# Altium PCB PCB.PcbDoc (part 2 of 3)
Units mm, origin at the board's own origin, x right, y up, seen from the top; angles counter-clockwise.
Board outline 70 x 30 mm, 4 copper layers (Top Layer, Layer 2, Layer 3, Bottom Layer), stack 1.571 mm thick; 89 components, 59 nets, 279 pads, 164 vias.
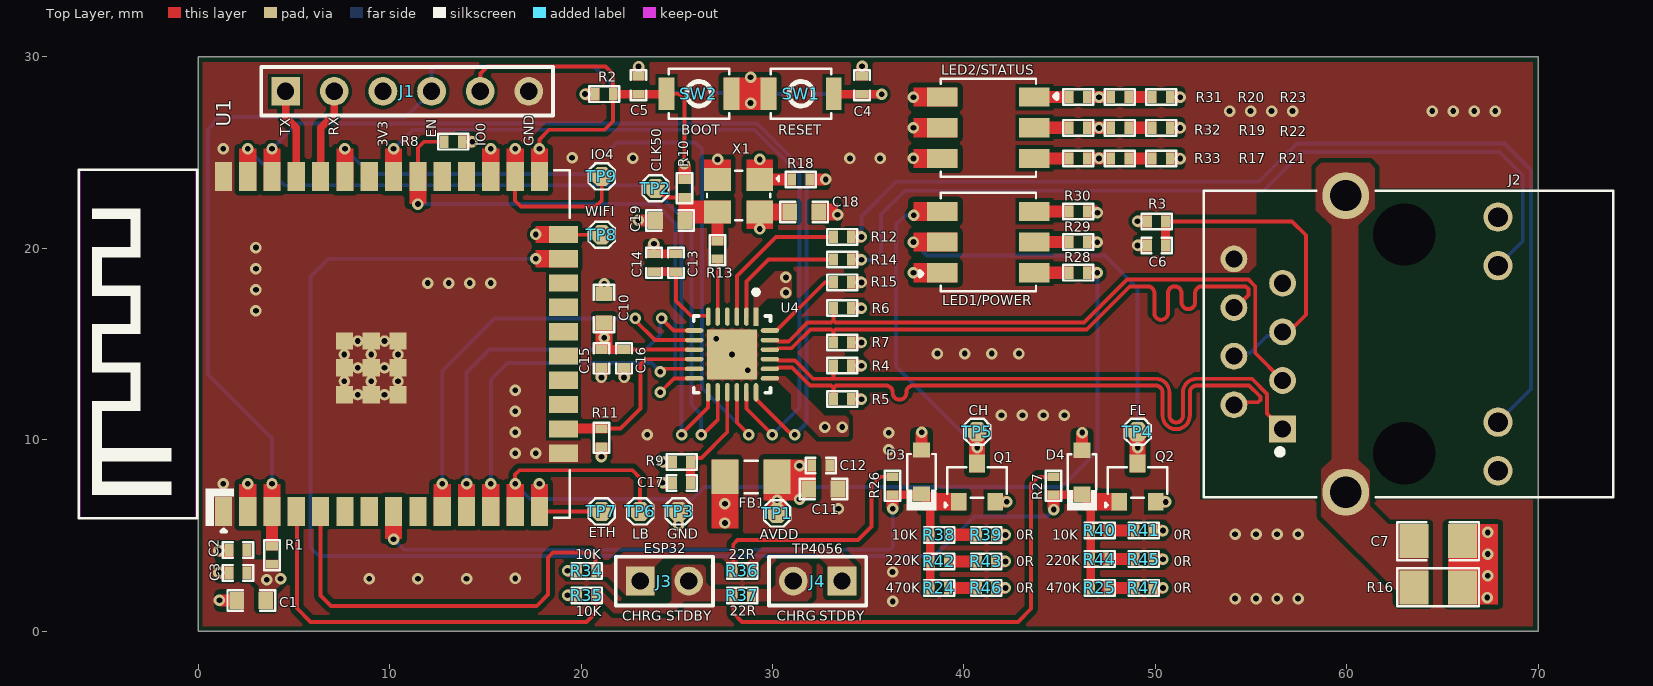
[diagram p0: Top Layer view]

## Part data (continued)
R24 R25: library part RC0402FR-07470KL, "RES 470K OHM 1% 1/16W 0402", Case Code (Imperial)=0402, Case Code (Metric)=1005, LCSC Part Number=C137976, Manufacturer=Yageo, Max Operating Temperature=155°C, Max Power Dissipation=63mW, Min Operating Temperature=-55°C, Package Quantity=1, Power Rating=62.5mW, Resistance Tolerance=1%, Resistor Type="Thick Film", Supplier Part Number=7702467, Temperature Coefficient=100ppm/°C, Voltage Rating=50V, Case/Package=0402, Category="Chip SMD Resistors", ComponentLink1Description=https://datasheet.ciiva.com/11819/0900766b80c66297-11819514.pdf?src-supplier=Rs, ComponentLink1URL=https://datasheet.ciiva.com/11819/0900766b80c66297-11819514.pdf?src-supplier=Rs, ComponentLink2Description=https://datasheet.ciiva.com/46412/1018594-46412837.pdf?src-supplier=Element14, ComponentLink2URL=https://datasheet.ciiva.com/46412/1018594-46412837.pdf?src-supplier=Element14, ComponentLink3Description=https://datasheet.ciiva.com/2453/pyu-r-int-thick-7-2453434.pdf?src-supplier=Digi-Key, ComponentLink3URL=https://datasheet.ciiva.com/2453/pyu-r-int-thick-7-2453434.pdf?src-supplier=Digi-Key, ComponentLink4Description=https://datasheet.ciiva.com/2453/pyu-r-int-thick-7-2453435.pdf?src-supplier=Digi-Key, ComponentLink4URL=https://datasheet.ciiva.com/2453/pyu-r-int-thick-7-2453435.pdf?src-supplier=Digi-Key, ComponentLink5Description=https://datasheet.ciiva.com/2453/pyu-r-int-thick-7-2453433.pdf?src-supplier=Digi-Key, ComponentLink5URL=https://datasheet.ciiva.com/2453/pyu-r-int-thick-7-2453433.pdf?src-supplier=Digi-Key, ComponentLink6Description=https://datasheet.ciiva.com/7850/1018594-7850012.pdf?src-supplier=Element14, ComponentLink6URL=https://datasheet.ciiva.com/7850/1018594-7850012.pdf?src-supplier=Element14, ComponentLink7Description=https://datasheet.ciiva.com/7850/1018594-7850013.pdf?src-supplier=Element14, ComponentLink7URL=https://datasheet.ciiva.com/7850/1018594-7850013.pdf?src-supplier=Element14, ComponentLink8Description=https://datasheet.ciiva.com/15189/getdatasheetpartid-325138-15189462.pdf?src-supplier=Verical, ComponentLink8URL=https://datasheet.ciiva.com/15189/getdatasheetpartid-325138-15189462.pdf?src-supplier=Verical, Construction=Rectangular, Depth=0.5mm, Features="Moisture Resistant", Height=0.016inch, Item Type=Resistor, Lead Free=5697LeadFree, Length=0.039inch, Manufacturer Part Number=RC0402FR-07470KL, Military Standard=Not, Number of Terminations=2, Packaging="Tape and Reel", Pins=2, Pricing="10000=0.0009, 50000=0.0008, 300000=0.0008, 1000000=0.0007, 3000000=0.0007 (USD)", Reach SVHC Compliant=No, RoHS=Yes, RoHS Compliant=Yes, Series=RC, Stock=330000, Supplier="Future Electronics", Technology="THICK FILM", Termination=SMD/SMT, Tolerance=1%, Voltage Rating (AC)=50V, Voltage Rating (DC)=50V, Width=0.02inch
R28 R29 R30 R31 R32 R33: library part RC0402FR-07100RL, "RES 100 OHM 1% 1/16W 0402", Case Code (Imperial)=0402, Case Code (Metric)=1005, LCSC Part Number=C106232, Manufacturer=Yageo, Max Operating Temperature=155°C, Max Power Dissipation=63mW, Min Operating Temperature=-55°C, Power Rating=62.5mW, Resistance Tolerance=1%, Resistor Type="Thick Film", Supplier Part Number 1=603-RC0402FR-07100RL, Temperature Coefficient=100ppm/°C, Voltage Rating=50V, Case/Package=0402, Category="Chip SMD Resistors", ComponentLink1Description=https://datasheet.ciiva.com/11808/0900766b80c66297-11808765.pdf?src-supplier=RSComponents, ComponentLink1URL=https://datasheet.ciiva.com/11808/0900766b80c66297-11808765.pdf?src-supplier=RSComponents, ComponentLink2Description=https://datasheet.ciiva.com/7849/1784430-7849810.pdf?src-supplier=Element14, ComponentLink2URL=https://datasheet.ciiva.com/7849/1784430-7849810.pdf?src-supplier=Element14, ComponentLink3Description=https://datasheet.ciiva.com/28367/1018594-28367226.pdf?src-supplier=Element14, ComponentLink3URL=https://datasheet.ciiva.com/28367/1018594-28367226.pdf?src-supplier=Element14, ComponentLink4Description=https://datasheet.ciiva.com/22747/1018594-22747511.pdf?src-supplier=Element14, ComponentLink4URL=https://datasheet.ciiva.com/22747/1018594-22747511.pdf?src-supplier=Element14, ComponentLink5Description=https://datasheet.ciiva.com/12667/pyu-rc0402-51-rohs-l-6-r-12667957.pdf?src-supplier=Mouser, ComponentLink5URL=https://datasheet.ciiva.com/12667/pyu-rc0402-51-rohs-l-6-r-12667957.pdf?src-supplier=Mouser, ComponentLink6Description=https://datasheet.ciiva.com/15189/getdatasheetpartid-329466-15189335.pdf?src-supplier=Verical, ComponentLink6URL=https://datasheet.ciiva.com/15189/getdatasheetpartid-329466-15189335.pdf?src-supplier=Verical, ComponentLink7Description=https://datasheet.ciiva.com/16740/pyu-rc0402-51-rohs-l-6-r-16740566.pdf?src-supplier=Future+Electronics, ComponentLink7URL=https://datasheet.ciiva.com/16740/pyu-rc0402-51-rohs-l-6-r-16740566.pdf?src-supplier=Future+Electronics, Construction=Rectangular, Depth=0.5mm, Features="Moisture Resistant", Height=0.32mm, Item Type=Resistor, Lead Free="Lead Free", Length=1mm, Manufacturer Part Number=RC0402FR-07100RL, Military Standard=Not, Number of Pins=2, Number of Terminations=2, Packaging="Tape and Reel", Pricing 1="1=0.10000, 10=0.01200, 50=0.01200, 100=0.00500, 1000=0.00300, 2500=0.00200, 10000=0.00100 (USD)", REACH SVHC="No SVHC", Resistance=100R, RoHS=Yes, RoHS Compliant=Yes, Series=RC, Size Code=0402, Stock 1=699545, Supplier 1=Mouser, Technology="THICK FILM", Termination=SMD/SMT, Tolerance=1%, Voltage Rating (DC)=50V, Width=0.5mm
R34 R35: library part RC0402FR-07100KL, "RES 100K OHM 1% 1/16W 0402", Case Code (Imperial)=0402, Case Code (Metric)=1005, LCSC Part Number=C60491, Manufacturer=Yageo, Max Operating Temperature=155°C, Max Power Dissipation=63mW, Min Operating Temperature=-55°C, Package Quantity=1, Resistance=100kR, Resistance Tolerance=1%, Resistor Type="Thick Film", Supplier Part Number 1=603-RC0402FR-07100KL, Temperature Coefficient=100ppm/°C, Voltage Rating=50V, Case/Package=0402, Category="Chip SMD Resistors", ComponentLink1Description=https://datasheet.ciiva.com/11819/0900766b80c66297-11819452.pdf?src-supplier=RSComponents, ComponentLink1URL=https://datasheet.ciiva.com/11819/0900766b80c66297-11819452.pdf?src-supplier=RSComponents, ComponentLink2Description=https://datasheet.ciiva.com/22747/1018594-22747509.pdf?src-supplier=Element14, ComponentLink2URL=https://datasheet.ciiva.com/22747/1018594-22747509.pdf?src-supplier=Element14, ComponentLink3Description=https://datasheet.ciiva.com/2453/pyu-r-int-thick-7-2453362.pdf?src-supplier=Digi-Key, ComponentLink3URL=https://datasheet.ciiva.com/2453/pyu-r-int-thick-7-2453362.pdf?src-supplier=Digi-Key, ComponentLink4Description=https://datasheet.ciiva.com/2453/pyu-r-int-thick-7-2453363.pdf?src-supplier=Digi-Key, ComponentLink4URL=https://datasheet.ciiva.com/2453/pyu-r-int-thick-7-2453363.pdf?src-supplier=Digi-Key, ComponentLink5Description=https://datasheet.ciiva.com/2453/pyu-r-int-thick-7-2453361.pdf?src-supplier=Digi-Key, ComponentLink5URL=https://datasheet.ciiva.com/2453/pyu-r-int-thick-7-2453361.pdf?src-supplier=Digi-Key, ComponentLink6Description=https://datasheet.ciiva.com/12667/pyu-rc0402-51-rohs-l-6-r-12667930.pdf?src-supplier=Mouser, ComponentLink6URL=https://datasheet.ciiva.com/12667/pyu-rc0402-51-rohs-l-6-r-12667930.pdf?src-supplier=Mouser, ComponentLink7Description=https://datasheet.ciiva.com/15189/getdatasheetpartid-323696-15189334.pdf?src-supplier=Verical, ComponentLink7URL=https://datasheet.ciiva.com/15189/getdatasheetpartid-323696-15189334.pdf?src-supplier=Verical, Construction=Rectangular, Depth=0.5mm, Features="Moisture Resistant", Height=0.016inch, Item Type=Resistor, Lead Free="Lead Free", Length=0.039inch, Manufacturer Part Number=RC0402FR-07100KL, Military Standard=Not, Number of Terminations=2, Packaging="Tape and Reel", Power Rating=63mW, Pricing 1="1=0.10000, 10=0.01200, 50=0.01200, 100=0.00500, 1000=0.00300, 2500=0.00200, 10000=0.00100 (USD)", REACH SVHC="No SVHC", RoHS=Yes, RoHS Compliant=Yes, Series=RC, Stock 1=7759549, Supplier 1=Mouser, Technology="THICK FILM", Termination=SMD/SMT, Tolerance=1%, Width=0.02inch, Working Voltage=50V
R36 R37: library part RC0402FR-0722RL, "RES 22 OHM 1% 1/16W 0402", Case Code (Imperial)=0402, Case Code (Metric)=1005, LCSC Part Number=C114765, Manufacturer=Yageo, Max Operating Temperature=155°C, Max Power Dissipation=63mW, Min Operating Temperature=-55°C, Power Rating=62.5mW, Resistance Tolerance=1%, Resistor Type="Thick Film", Temperature Coefficient=100ppm/°C, Voltage Rating=50V, Case/Package=0402, Category="Chip SMD Resistors", ComponentLink1Description=https://datasheet.ciiva.com/11819/0900766b80c66297-11819462.pdf?src-supplier=RSComponents, ComponentLink1URL=https://datasheet.ciiva.com/11819/0900766b80c66297-11819462.pdf?src-supplier=RSComponents, ComponentLink2Description=https://datasheet.ciiva.com/7849/1018594-7849912.pdf?src-supplier=Element14, ComponentLink2URL=https://datasheet.ciiva.com/7849/1018594-7849912.pdf?src-supplier=Element14, ComponentLink3Description=https://datasheet.ciiva.com/7849/1018594-7849911.pdf?src-supplier=Element14, ComponentLink3URL=https://datasheet.ciiva.com/7849/1018594-7849911.pdf?src-supplier=Element14, ComponentLink4Description=https://datasheet.ciiva.com/16930/pyu-rc0402-51-rohs-l-6-r-16930687.pdf?src-supplier=Future+Electronics, ComponentLink4URL=https://datasheet.ciiva.com/16930/pyu-rc0402-51-rohs-l-6-r-16930687.pdf?src-supplier=Future+Electronics, ComponentLink5Description=https://datasheet.ciiva.com/26829/getdatasheetpartid-554995-26829991.pdf?src-supplier=Verical, ComponentLink5URL=https://datasheet.ciiva.com/26829/getdatasheetpartid-554995-26829991.pdf?src-supplier=Verical, Construction=Rectangular, Depth=0.5mm, Features="Moisture Resistant", Height=0.32mm, Item Type=Resistor, Lead Free="Lead Free", Length=1mm, Manufacturer Part Number=RC0402FR-0722RL, Military Standard=Not, Number of Pins=2, Number of Terminations=2, Packaging="Tape and Reel", Pricing 1="10000=0.00085 (USD)", Reach SVHC Compliant=Yes, Resistance=22R, RoHS=Yes, RoHS Compliant=Yes, Series=RC, Size Code=0402, Stock 1=1810000, Supplier 1=Avnet, Supplier Part Number 1=RC0402FR-0722RL, Technology="THICK FILM", Termination=SMD/SMT, Tolerance=1%, Voltage Rating (DC)=50V, Width=0.5mm
R42 R44: library part RC0402FR-07220KL, "RES 220K OHM 1% 1/16W 0402", Case Code (Imperial)=0402, Case Code (Metric)=1005, LCSC Part Number=C138030, Manufacturer=Yageo, Max Operating Temperature=155°C, Max Power Dissipation=63mW, Min Operating Temperature=-55°C, Package Quantity=1, Power Rating=62.5mW, Resistance=220kR, Resistance Tolerance=1%, Resistor Type="Thick Film", Temperature Coefficient=100ppm/°C, Voltage Rating=50V, Case/Package=0402, Category="Chip SMD Resistors", ComponentLink1Description=https://datasheet.ciiva.com/11808/0900766b80c66297-11808792.pdf?src-supplier=RSComponents, ComponentLink1URL=https://datasheet.ciiva.com/11808/0900766b80c66297-11808792.pdf?src-supplier=RSComponents, ComponentLink2Description=https://datasheet.ciiva.com/5924/1018594-5924944.pdf?src-supplier=Farnell, ComponentLink2URL=https://datasheet.ciiva.com/5924/1018594-5924944.pdf?src-supplier=Farnell, ComponentLink3Description=https://datasheet.ciiva.com/2453/pyu-r-int-thick-7-2453533.pdf?src-supplier=Digi-Key, ComponentLink3URL=https://datasheet.ciiva.com/2453/pyu-r-int-thick-7-2453533.pdf?src-supplier=Digi-Key, ComponentLink4Description=https://datasheet.ciiva.com/2453/pyu-r-int-thick-7-2453534.pdf?src-supplier=Digi-Key, ComponentLink4URL=https://datasheet.ciiva.com/2453/pyu-r-int-thick-7-2453534.pdf?src-supplier=Digi-Key, ComponentLink5Description=https://datasheet.ciiva.com/2453/pyu-r-int-thick-7-2453532.pdf?src-supplier=Digi-Key, ComponentLink5URL=https://datasheet.ciiva.com/2453/pyu-r-int-thick-7-2453532.pdf?src-supplier=Digi-Key, ComponentLink6Description=https://datasheet.ciiva.com/12577/pyu-rc0402-51-rohs-l-6-r-12577270.pdf?src-supplier=Mouser, ComponentLink6URL=https://datasheet.ciiva.com/12577/pyu-rc0402-51-rohs-l-6-r-12577270.pdf?src-supplier=Mouser, Construction=Rectangular, Depth=0.5mm, Features="Moisture Resistant", Height=0.016inch, Item Type=Resistor, Lead Free="Lead Free", Length=1mm, Manufacturer Part Number=RC0402FR-07220KL, Military Standard=Not, Number of Terminations=2, Packaging="Tape and Reel", Pricing 1="10000=0.00130 (USD)", Reach SVHC Compliant=Yes, RoHS=Yes, RoHS Compliant=Yes, Series=RC, Size Code=0402, Stock 1=210000, Supplier 1="Arrow Electronics", Supplier Part Number 1=RC0402FR-07220KL, Technology="THICK FILM", Termination=SMD/SMT, Tolerance=1%, Weight=2.3E-05oz, Width=0.02inch
SW1 SW2: "SWITCH TACTILE SPST-NO 0.05A 12V", Contact Current Rating=50mA, Contact Resistance=100mR, Insulation Resistance=100MR, LCSC Part Number=C231329, Manufacturer=Omron, Max Operating Temperature=70°C, Max Voltage Rating (DC)=12V, Min Operating Temperature=-25°C, Operating Force=1.5N, Package Quantity=1, Ratings="Dust Proof,IP40", Supplier Part Number 1=SW1020DKR-ND, Actuator Length=0.4mm, Actuator Type=Standard, ComponentLink1Description=http://www.farnell.com/datasheets/60838.pdf?src-supplier=Farnell, ComponentLink1URL=http://www.farnell.com/datasheets/60838.pdf?src-supplier=Farnell, ComponentLink2Description=http://www.farnell.com/datasheets/60838.pdf?src-supplier=Element14, ComponentLink2URL=http://www.farnell.com/datasheets/60838.pdf?src-supplier=Element14, ComponentLink3Description=https://omronfs.omron.com/en_US/ecb/products/pdf/en-b3u.pdf?src-supplier=Digi-Key, ComponentLink3URL=https://omronfs.omron.com/en_US/ecb/products/pdf/en-b3u.pdf?src-supplier=Digi-Key, ComponentLink4Description=http://www.omron.com/ecb/products/pdf/en-b3u.pdf?src-supplier=Digi-Key, ComponentLink4URL=http://www.omron.com/ecb/products/pdf/en-b3u.pdf?src-supplier=Digi-Key, ComponentLink5Description=https://www.distrelec.biz/Web/Downloads/he/et/B3U_eng_datasheet.pdf?mime=application%2Fpdf&src-supplier=Distrelec, ComponentLink5URL=https://www.distrelec.biz/Web/Downloads/he/et/B3U_eng_datasheet.pdf?mime=application%2Fpdf&src-supplier=Distrelec, ComponentLink6Description=http://www.onlinecomponents.com/productFiles/mf-OM/en-b3u.pdf?src-supplier=Onlinecomponents.com, ComponentLink6URL=http://www.onlinecomponents.com/productFiles/mf-OM/en-b3u.pdf?src-supplier=Onlinecomponents.com, ComponentLink7Description=https://www.verical.com/server-webapp/html/getDatasheet?partID=552554&src-supplier=Verical, ComponentLink7URL=https://www.verical.com/server-webapp/html/getDatasheet?partID=552554&src-supplier=Verical, ComponentLink8Description=http://www.farnell.com/datasheets/1685550.pdf?src-supplier=Element14, ComponentLink8URL=http://www.farnell.com/datasheets/1685550.pdf?src-supplier=Element14, ComponentLink9Description=http://www.farnell.com/datasheets/2610940.pdf?src-supplier=Farnell, ComponentLink9URL=http://www.farnell.com/datasheets/2610940.pdf?src-supplier=Farnell, ComponentLink10Description=https://www.alliedelec.com/m/d/4c8a9ef82804fc3c241a13c1e298fd73.pdf?src-supplier=Allied+Electronics, ComponentLink10URL=https://www.alliedelec.com/m/d/4c8a9ef82804fc3c241a13c1e298fd73.pdf?src-supplier=Allied+Electronics, Contact Material=Silver, Current Rating=50mA, Depth=2.5mm, Electrical Life=200000Cycles, Height=1.2mm, Illumination Type=Non-Illuminated,Illuminated, Item Type=Switch, Lead Free="Lead Free", Length=4mm, Manufacturer Part Number=B3U-1000P, Max Current Rating=50mA, Mechanical Life=200000Cycles, Mount="Surface Mount", Orientation=Straight, Packaging="Tape and Reel", Pricing 1="1=1, 10=0.961, 25=0.9064, 50=0.7976, 100=0.7251, 250=0.68888, 500=0.67074, 1000=0.52571 (USD)", REACH SVHC=Unknown, Stock 1=116454, Supplier 1=Digi-Key, Switch Function=Off-Mom, Switch Travel=0.15mm, Termination=SMD/SMT, Throw Configuration=SPST, Voltage Rating (DC)=12V, Weight=0.000776oz, Width=3mm
TP1 TP2 TP3 TP4 TP5 TP6 TP7 TP8 TP9: "Test Point ON", Item Type="Test Point", Manufacturer Part Number="TEST POINT 0.5mm Dia"
U1: "RX TXRX MOD WIFI TRACE ANT SMD", LCSC Part Number=C701341, Manufacturer="Espressif Systems", Supplier Part Number 1=1965-ESP32-WROOM-32E(4MB)CT-ND, ComponentLink1Description="LCSC Link", ComponentLink1URL=https://lcsc.com/product-detail/WiFi-Modules_ESPRESSIF-ESP32-WROOM-32E-N4_C701341.html, Manufacturer Part Number=ESP32-WROOM-32E-N4, Pricing 1="1=3.00000 (USD)", RoHS=No, Supplier 1=Digi-Key
U4: "IC TRANSCEIVER FULL 2/2 24SQFN", LCSC Part Number=C45223, Manufacturer=MICROCHIP, Max Operating Temperature=85°C, Min Operating Temperature=0°C, Package=QFN-24-EP(4x4), ComponentLink1Description="LCSC Link", ComponentLink1URL=https://www.lcsc.com/product-detail/C45223.html?s_z=n_LAN8720A, Item Type=RMII, Manufacturer Part Number=LAN8720A-CP-TR, Mount="Surface Mount", Packaging="Tape and Reel", Simplex/Duplex="Full Duplex"
X1: library part OT2EL4C4JI-111OLP-50M, "1.8V~3.3V ±10ppm ±20ppm CMOS 50MHz SMD3225-4P Crystal Oscillators ROHS", LCSC Part Number=C5203552, Manufacturer="YXC Crystal Oscillators", Package=SMD3225-4P, ComponentLink1Description="LCSC Link", ComponentLink1URL=https://lcsc.com/product-detail/Crystal-Oscillators_YXC-Crystal-Oscillators-OT2EL4C4JI-111OLP-50M_C5203552.html, Item Type=Crystal, Manufacturer Part Number=OT2EL4C4JI-111OLP-50M

## Via types
v1: diameter 0.6, hole 0.3, Top Layer to Bottom Layer, tented top, 164 vias

## Nets (pads, with @x,y where several pads share a name; then routed paths per layer and width w, separated by ;. In a path a pad name is that pad's centre, name@x,y a point inside that pad or via, vN(x,y) a via of type N, cw(c..) or ccw(c..) an arc to the next point about the centre after c; other vN are vias at no path point)
+3.3_OUT: C1.1 C2.2 C3.2 C10.2 C15.1 C16.1 C18.2 FB1.2 J1.3 LED1/POWER.1 Q1.2 Q2.2 R1.2 R2.2 R8.2 R9.2 R11.2 R34.2 R35.2 R39.1 R41.1 R43.1 R45.1 R46.1 R47.1 U1.2 U4.9 X1.4 | length 3.7
  Top Layer w0.203: C16.1@22.255,14.714 22.261,14.708 25.908,14.708 U4.9@25.914,14.703
  other v1: 19.3,1.874 42.168,2.253 50.397,2.253 3.582,2.686 4.31,2.731 19.3,3.155 42.168,3.637 50.397,3.751 42.168,5.021 50.397,5.25 27.52,5.647 27.52,6.647 42.23,6.754 50.537,6.746 2.59,7.697 24.26,8.835 21.066,9.102 21.209,15.322 37.363,18.72 29.331,21.005 14.315,25.554 20.215,28.052
AVDD: C11.2 C12.1 FB1.1 J2.9 J2.12 R3.2 R4.2 R5.2 R6.2 R7.2 TP1.1 U4.1 U4.19
  other v1: 30.239,6.83 31.414,6.883 31.414,8.642 32.742,10.657 33.651,10.657 34.646,12.108 34.646,13.856 34.646,15.075 34.646,16.866 30.702,17.682 30.702,18.475 49.069,21.408
CH: LED1/POWER.5 Q1.3 TP5.1 | length 15.4
  Top Layer w0.203: v1(40.691,9.589) TP5.1@40.691,10.414
  Bottom Layer w0.203: v1(37.384,21.718) 36.933,21.718 36.449,21.234 36.449,13.831 v1(40.691,9.589)
CHG_LED: D3.1 Q1.1 R24.1 R26.2 R38.2 R42.1 U1.8 | length 32
  Top Layer w0.203: R26.2@36.271,7.125 37.747,7.125 D3.1@37.785,7.162 38.554,7.162 38.963,6.754 Q1.1@39.731,6.754
  Bottom Layer w0.203: v1(10.21,4.803) 10.763,4.25 36.127,4.25 36.28,4.403 v1(36.28,6.388)
CHRG: J3.1 R26.1 R34.1 R36.1 U1.5 | length 34.5
  Top Layer w0.203: U1.5@6.4,6.25 6.4,1.855 6.934,1.321 17.69,1.321 18.28,1.911 18.28,3.853 18.542,4.115 20.474,4.115 20.764,3.824 R34.1@20.764,3.147 ; R36.1@27.953,3.147 27.953,4.521 28.181,4.75 34.461,4.75 35.179,5.468 35.179,7.595 35.649,8.064 R26.1@36.271,8.064
CLK50M: C19.2 R10.1 R13.1 TP2.1 X1.3 | length 1.7
  Top Layer w0.203: TP2.1@23.891,23.124 23.938,23.124 24.408,22.654 R10.1@25.415,22.654
EN: C4.1 J1.4 R1.1 SW1.2 U1.3 | length 58.7
  Top Layer w0.203: C4.1@34.671,28.044 v1(35.712,28.044)
  Bottom Layer w0.203: v1(3.86,7.697) 3.86,10.059 0.508,13.411 0.508,26.213 1.143,26.848 10.846,26.848 J1.4@12.192,28.194 12.192,29.286 12.395,29.489 20.676,29.489 22.057,28.108 29.073,28.108 29.137,28.044 v1(35.712,28.044)
ETH2X_LED1: J2.10 R12.2 | length 52.1
  Bottom Layer w0.203: v1(34.646,20.587) 34.646,21.655 36.461,23.47 55.397,23.47 57.404,25.476 68.224,25.476 69.624,24.076 69.624,12.644 J2.10@67.895,10.915
ETH2X_LED2: J2.11 R14.2 | length 43.8
  Bottom Layer w0.203: v1(34.646,19.393) 35.268,19.393 35.671,19.796 35.671,21.753 36.918,23 55.639,23 57.658,25.019 67.97,25.019 69.19,23.8 69.19,20.38 J2.11@67.895,19.085
ETHERNET: R20.2 R31.2 TP7.1 U1.14 | length 51.8
  Top Layer w0.203: U1.14@17.83,6.25 TP7.1@21.074,6.25
  Layer 3 w0.203: v1(17.83,7.697) 19.099,8.966 19.099,20.373 21.174,22.449 47.161,22.449 48.362,23.65 48.362,26.586 v1(47.059,27.889)
FL: LED1/POWER.3 Q2.3 TP4.1 | length 21.9
  Top Layer w0.203: v1(49.073,9.589) TP4.1@49.073,10.414
  Bottom Layer w0.203: v1(37.363,20.32) 38.074,19.609 47.371,19.609 49.073,17.907 v1(49.073,9.589)
FULL_LED: D4.1 Q2.1 R25.1 R27.2 R40.2 R44.1 U1.23 | length 70
  Top Layer w0.203: R27.2@44.653,7.125 46.129,7.125 46.167,7.162 46.936,7.162 47.345,6.754 Q2.1@48.113,6.754
  Bottom Layer w0.203: v1(17.633,19.45) 6.801,19.45 5.867,18.517 5.867,4.365 6.313,3.92 38.463,3.92 40.538,5.994 44.333,5.994 v1(44.687,6.349)